# Altium PCB PWM Header Board.PcbDoc
Units mil, origin at the board's own origin, x right, y up, seen from the top; angles counter-clockwise.
Board outline 1402.76 x 2381.33 mil, 2 copper layers (Top Layer, Bottom Layer); 11 components, 21 nets, 87 pads, 5 vias.
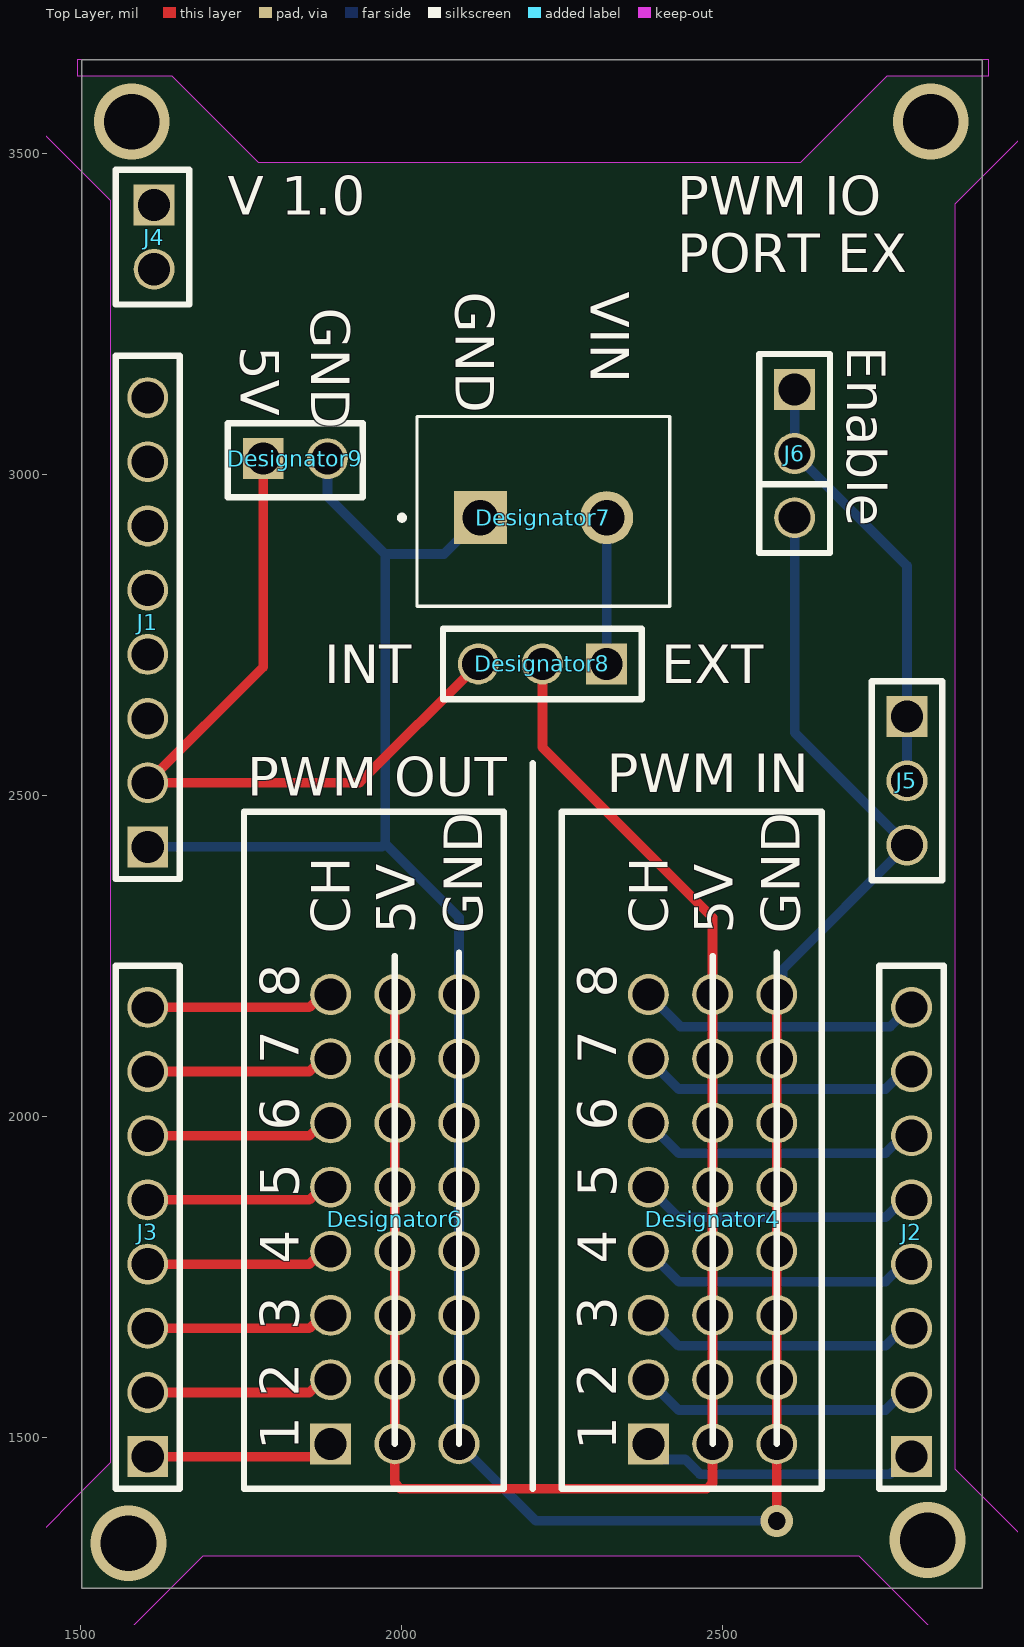
[diagram p0: Top Layer view]
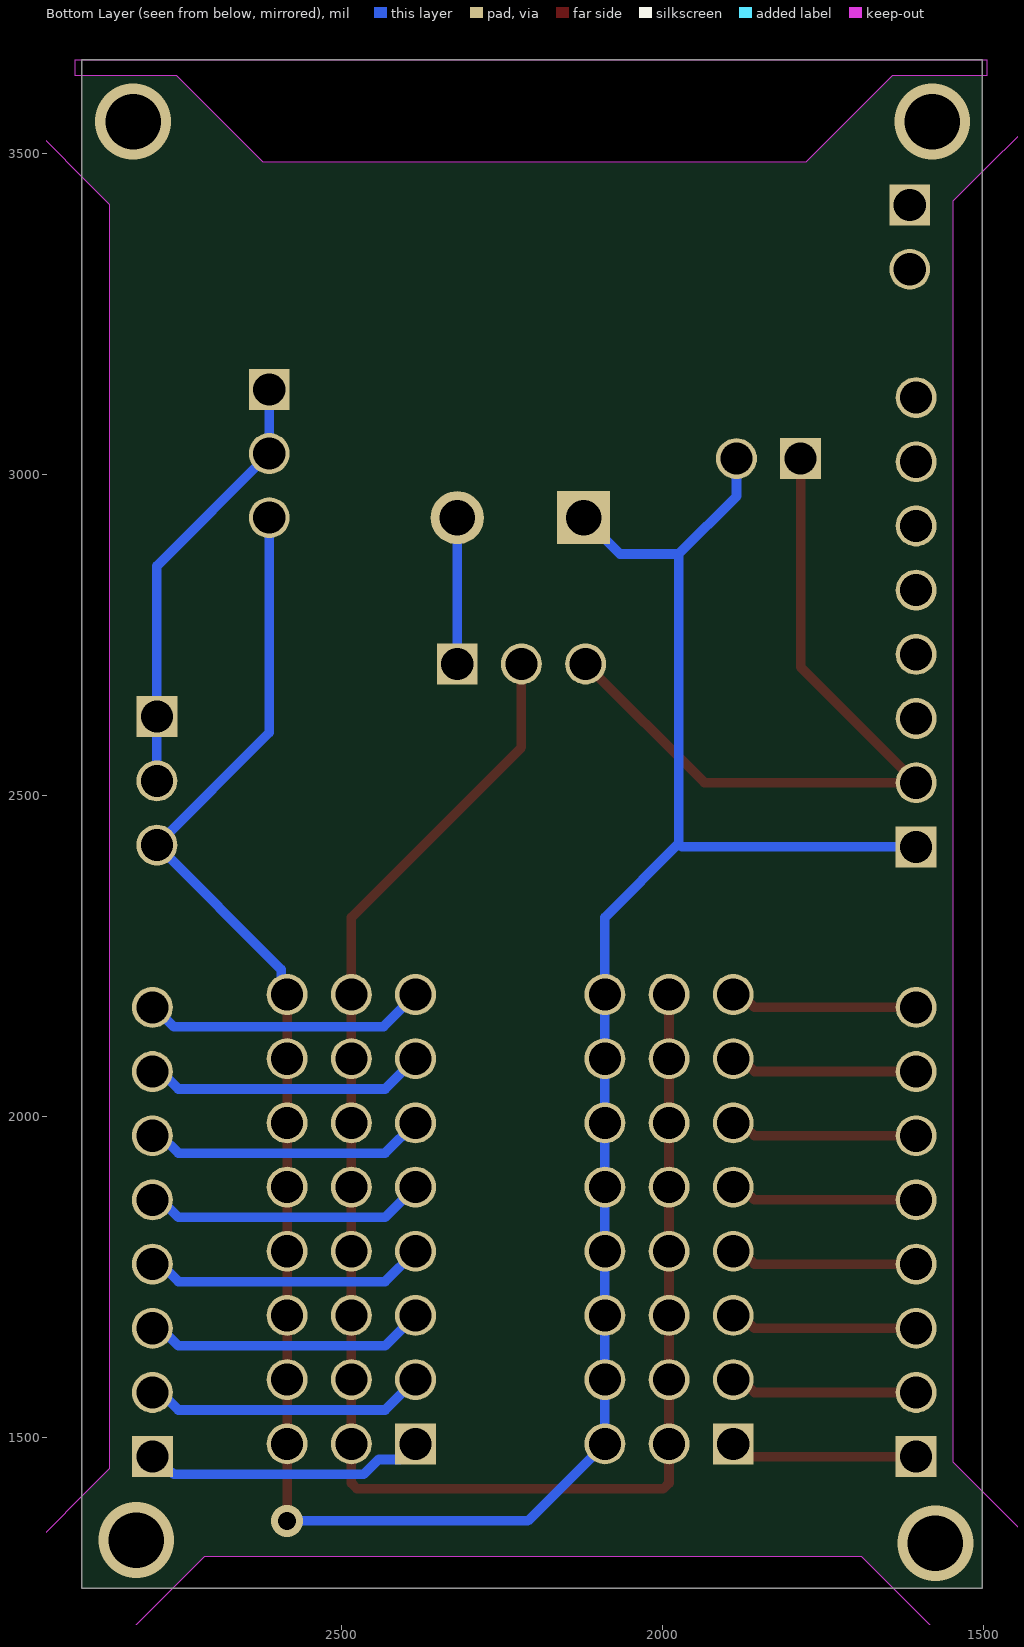
[diagram p1: Bottom Layer view, seen from below]

## Layer stack, top to bottom
Top Solder: solder mask 0.4, Solder Resist, Dk 3.5
Top Layer: signal copper 1.4
Dielectric 1: dielectric 12.6, FR-4, Dk 4.8
Bottom Layer: signal copper 1.4
Bottom Solder: solder mask 0.4, Solder Resist, Dk 3.5

## Board outline
1502.24,1265 1502.24,3646.33 2905,3646.33 2905,1265
cut-out: 1495,3621.33 1642.24,3621.33 1777.24,3486.33 2622.24,3486.33 2757.24,3621.33 2915,3621.33 2915,3646.33 1495,3646.33
cut-out: 1642.24,3621.33 1777.24,3486.33 2622.24,3486.33 2757.24,3621.33 2915,3621.33 2915,3646.33 1495,3646.33 1495,3621.33
cut-out: 3000,3559.09 2862.24,3421.33 2862.24,1451.33 3000,1313.57
cut-out: 2868.57,1160 2713.57,1315 1690.91,1315 1535.91,1160
cut-out: 1390,1304.09 1547.24,1461.33 1547.24,3426.33 1390,3583.57

## Design rules (kind name [scope] priority, off if disabled: settings)
Clearance Clearance_1 [OnMid vs OnMid] p1: gap=7.87 ignorepadtopadclearanceinfootprint=FALSE sourcerule=37 cellrowname=All cellrowtype=0 cellcolname=All cellcoltype=0 innerlayers=TRUE
Clearance Clearance_2 [(ExistsOnLayer('Top Layer') Or ExistsOnLayer('Bottom Layer')) vs (ExistsOnLayer('Top Layer') Or ExistsOnLayer('Bottom Layer'))] p2: gap=7.87 ignorepadtopadclearanceinfootprint=FALSE sourcerule=37 cellrowname=All cellrowtype=0 cellcolname=All cellcoltype=0 outerlayers=TRUE
Clearance [All] p3: gap=10 ignorepadtopadclearanceinfootprint=FALSE ismatrix=TRUE
PolygonConnect [All] p1: connectstyle=Relief reliefconductorwidth=10 reliefentries=4 polygonreliefangle="90 Angle" airgapwidth=10
RoutingVias [All] p1: holewidth=28 width=50 viastyle="Through Hole" minholewidth=28 minwidth=50 maxholewidth=28 maxwidth=50
SolderMaskExpansion [All] p1: expansion=4 istentingtop=FALSE
Width MaxMinWidth_1 [All] p1: maxlimit=20 minlimit=10 preferedwidth=20 minimp=50.000000 maximp=50.000000 favimp=50.000000
Width [All] p2: maxlimit=10 minlimit=10 preferedwidth=10
30 further rules are at their usual default settings.

## Components (designator, comment, footprint, x,y, rotation, side; value= is the part's Value field where it differs from the comment)
Designator4 "Comment" "PWM 8Ch Connector-Footprint-1" 2385,1490 r90 top
Designator6 "Comment" "PWM 8Ch Connector-Footprint-1" 1890,1490 r90 top
Designator7 "Comment" "Off Board Connector-Footprint-1" 2225.62,2934.11 r0 top
Designator8 "Comment" "3 Pin Header-Footprint-1" 2220,2705 r180 top
Designator9 "Comment" "2 Pin Header-Footprint-1" 1785,3025 r0 top
J1 "8 Pin Header" "8 Pin Header-Footprint-1" 1605,2920 r90 top
J2 "8 Pin Header" "8 Pin Header-Footprint-1" 2795,1970 r90 top
J3 "8 Pin Header" "8 Pin Header-Footprint-1" 1605,1970 r90 top
J4 "2 Pin Header" "2 Pin Header-Footprint-1" 1615,3420 r270 top
J5 "3 Pin Header" "3 Pin Header-Footprint-1" 2787.91,2522.87 r270 top
J6 "3 Pin Header" "3 Pin Header-Footprint-1" 2612.91,3032.87 r270 top (schematic designator J5)

## Footprints (in the part's own frame and the unit in brackets; to place one, negate y for a bottom-side part, rotate by r counter-clockwise, add the part's x,y. Pads: shape width x height; smd on the part's side, far side on the other; paste and mask are expansions set on the pad)
"2 Pin Header-Footprint-1" [mm]
  rect 1.62x1.62 hole 1.27: 1(0,0)
  round 1.62 hole 1.27: 2(2.54,0)
  silkscreen extent -1.4,-1.52 3.94,1.4
"3 Pin Header-Footprint-1" [mm]
  rect 1.62x1.62 hole 1.27: 1(-2.54,0)
  round 1.62 hole 1.27: 2(0,0) 3(2.54,0)
  silkscreen extent -3.94,-1.4 3.94,1.4
"8 Pin Header-Footprint-1" [mm]
  rect 1.62x1.62 hole 1.27: 1(-12.7,0)
  round 1.62 hole 1.27: 2(-10.16,0) 3(-7.62,0) 4(-5.08,0) 5(-2.54,0) 6(0,0) 7(2.54,0) 8(5.08,0)
  silkscreen extent -13.97,-1.27 6.73,1.27, body extent -12.34,-0.94 -0.34,1.06, height 6
"Off Board Connector-Footprint-1" [mm]
  rect 2.1x2.1 hole 1.4: 1(-2.603,-0.031)
  round 2.1 hole 1.4: 2(2.397,-0.031)
  silkscreen extent -5.8,-3.53 4.9,3.97, body extent -5.66,-3.34 4.94,4.16, height 10
"PWM 8Ch Connector-Footprint-1" [mm]
  rect 1.62x1.62 hole 1.27: 1(0,0)
  round 1.62 hole 1.27: 2(2.54,0) 3(5.08,0) 4(7.62,0) 5(10.16,0) 5V(0,-2.54) 5V(2.54,-2.54) 5V(5.08,-2.54) 5V(7.62,-2.54) 5V(10.16,-2.54) 5V(12.7,-2.54) 5V(15.24,-2.54) 5V(17.78,-2.54) 6(12.7,0) 7(15.24,0) 8(17.78,0) GND(0,-5.08) GND(2.54,-5.08) GND(5.08,-5.08) GND(7.62,-5.08) GND(10.16,-5.08) GND(12.7,-5.08) GND(15.24,-5.08) GND(17.78,-5.08)
  silkscreen extent -1.78,-6.86 25.02,3.43

## Part data
J1 J2 J3: library part CMP-00039-1, "8 Pin Breakout Header"
J4: library part CMP-00041-1, "2Pin  Breakout Header"
J5 J6: library part CMP-00043-1, "3 Pin Breakout Header"

## Via types
v1: diameter 118.11, hole 86.61, Top Layer to Bottom Layer, 4 vias
v2: diameter 50, hole 28, Top Layer to Bottom Layer, 1 vias

## Nets (pads, with @x,y where several pads share a name; then routed paths per layer and width w, separated by ;. In a path a pad name is that pad's centre, name@x,y a point inside that pad or via, vN(x,y) a via of type N, cw(c..) or ccw(c..) an arc to the next point about the centre after c; other vN are vias at no path point)
5v: Designator4.5V Designator6.5V Designator8.2 | length 2649.5
  Top Layer w15: Designator6.5V@1990,2190 1990,2090 1990,1990 1990,1890 1990,1790 1990,1690 1990,1590 1990,1490 1990,1428.79 1998.79,1420 2476.21,1420 2485,1428.79 2485,1490 2485,1590 2485,1690 2485,1790 2485,1890 2485,1990 2485,2090 2485,2190 2485,2310 2220,2575 Designator8.2
"5V_I N": Designator8.3 Designator9.1 J1.2 | length 1171.2
  Top Layer w15: Designator9.1 1785,2700 J1.2 1935,2520 Designator8.3
6V_IN: Designator7.2 Designator8.1 | length 228.8
  Bottom Layer w15: Designator8.1@2319.38,2705.62 Designator8.1 Designator7.2
CH_0_IN: Designator4.1 J2.1 | length 440.9
  Bottom Layer w15: Designator4.1 2409.39,1465.61 2442.55,1465.61 2465.42,1442.74 2761.82,1442.74 2764.7,1445.61 2770.61,1445.61 J2.1
CH_0_OUT: Designator6.1 J3.1 | length 314.5
  Top Layer w15: J3.1 1870,1470 Designator6.1
  Bottom Layer w15: Designator6.1@1875,1475 Designator6.1
CH_1_IN: Designator4.2 J2.2 | length 440.9
  Bottom Layer w15: Designator4.2 2432.26,1542.74 2754.54,1542.74 2781.8,1570 J2.2
CH_1_OUT: Designator6.2 J3.2 | length 303.9
  Top Layer w15: J3.2 1856.8,1570 1876.8,1590 Designator6.2
  Bottom Layer w15: Designator6.2@1882.5,1582.5 Designator6.2
CH_2_IN: Designator4.3 J2.3 | length 440.9
  Bottom Layer w15: Designator4.3 2432.26,1642.74 2754.54,1642.74 2781.8,1670 J2.3
CH_2_OUT: Designator6.3 J3.3 | length 303.9
  Top Layer w15: J3.3 1856.8,1670 1876.8,1690 Designator6.3
  Bottom Layer w15: Designator6.3@1882.5,1682.5 Designator6.3
CH_3_IN: Designator4.4 J2.4 | length 440.9
  Bottom Layer w15: Designator4.4 2432.26,1742.74 2754.54,1742.74 2781.8,1770 J2.4
CH_3_OUT: Designator6.4 J3.4 | length 303.9
  Top Layer w15: J3.4 1856.8,1770 1876.8,1790 Designator6.4
  Bottom Layer w15: Designator6.4@1882.5,1782.5 Designator6.4
CH_4_IN: Designator4.5 J2.5 | length 440.9
  Bottom Layer w15: Designator4.5 2432.26,1842.74 2754.54,1842.74 2781.8,1870 J2.5
CH_4_OUT: Designator6.5 J3.5 | length 303.9
  Top Layer w15: J3.5 1856.8,1870 1876.8,1890 Designator6.5
  Bottom Layer w15: Designator6.5@1882.5,1882.5 Designator6.5
CH_5_IN: Designator4.6 J2.6 | length 440.9
  Bottom Layer w15: Designator4.6 2432.26,1942.74 2754.54,1942.74 2781.8,1970 J2.6
CH_5_OUT: Designator6.6 J3.6 | length 303.9
  Top Layer w15: J3.6 1856.8,1970 1876.8,1990 Designator6.6
  Bottom Layer w15: Designator6.6@1882.5,1982.5 Designator6.6
CH_6_IN: Designator4.7 J2.7 | length 440.9
  Bottom Layer w15: Designator4.7 2432.26,2042.74 2754.54,2042.74 2781.8,2070 J2.7
CH_6_OUT: Designator6.7 J3.7 | length 303.9
  Top Layer w15: J3.7 1856.8,2070 1876.8,2090 Designator6.7
  Bottom Layer w15: Designator6.7@1882.5,2082.5 Designator6.7
CH_7_IN: Designator4.8 J2.8 | length 443.1
  Bottom Layer w15: Designator4.8 2435,2140 2761.82,2140 2791.82,2170 J2.8
CH_7_OUT: Designator6.8 J3.8 | length 303.9
  Top Layer w15: J3.8 1856.8,2170 1876.8,2190 Designator6.8
  Bottom Layer w15: Designator6.8@1882.5,2182.5 Designator6.8
Enable: J5.1 J5.2 J6.1 J6.2 | length 682.5
  Bottom Layer w15: J6.1 J6.2 2787.91,2857.87 J5.1 J5.2
GND: Designator4.GND Designator6.GND Designator7.1 Designator9.2 J1.1 J5.3 J6.3 | length 4429.5
  Top Layer w15: v2(2585,1370) 2585,1490 2585,1590 2585,1690 2585,1790 2585,1890 2585,1990 2585,2090 Designator4.GND@2585,2190
  Bottom Layer w15: J1.1 1970,2420 1975,2425 ; Designator9.2 1885,2966.24 1975,2876.24 ; Designator7.1@2121.91,2934.11 Designator7.1 2066.52,2876.24 1975,2876.24 ; v2(2585,1370) 2210,1370 2090,1490 2090,1590 2090,1690 2090,1790 2090,1890 2090,1990 2090,2090 2090,2190 2090,2310 1975,2425 ; Designator4.GND@2585,2190 2594.33,2199.33 2594.33,2229.29 J5.3 2612.91,2597.87 J6.3 ; 1975,2425 1975,2876.24
pads on no net: J1.3 J1.4 J1.5 J1.6 J1.7 J1.8 J4.1 J4.2
copper on no net:
  other v1: 1575,1335 2820,1340 1580,3550 2825,3550

## Silkscreen, mask and mechanical layers (free items; w line width, h text height)
Top Overlay:
  lines w10: 2205,1420 2205,2550 ; 2560,2985 2665,2985
  text "V 1.0" at 1730,3405 h60
  text "PWM IO" at 2430,3405 h60
  text "PORT EX" at 2430,3315 h60
  text "GND" at 2085,3285 h60 r270
  text "VIN" at 2295,3285 h60 r270
  text "GND" at 1860,3260 h60 r270
  text "5V" at 1750,3200 h60 r270
  text "Enable" at 2695,3200 h60 r270
  text "INT" at 1880,2675 h60
  text "EXT" at 2405,2675 h60
  text "PWM IN" at 2320,2505 h60
  text "PWM OUT" at 1760,2500 h60

## Text inside footprints (layer, text, board x,y; h text height)
Designator4: Top Overlay "GND" at 2621.15,2284.48 h60 r90; Top Overlay "5V" at 2516.15,2284.48 h60 r90; Top Overlay "CH" at 2415,2285 h60 r90; Top Overlay "7" at 2335,2081.43 h60 r90; Top Overlay "6" at 2335,1977.86 h60 r90; Top Overlay "5" at 2335,1874.29 h60 r90; Top Overlay "4" at 2335,1770.72 h60 r90; Top Overlay "3" at 2335,1667.15 h60 r90; Top Overlay "2" at 2335,1563.58 h60 r90; Top Overlay "1" at 2335,1480 h60 r90; Top Overlay "8" at 2335,2185 h60 r90
Designator6: Top Overlay "GND" at 2126.15,2284.48 h60 r90; Top Overlay "5V" at 2021.15,2284.48 h60 r90; Top Overlay "CH" at 1920,2285 h60 r90; Top Overlay "7" at 1840,2081.43 h60 r90; Top Overlay "6" at 1840,1977.86 h60 r90; Top Overlay "5" at 1840,1874.29 h60 r90; Top Overlay "4" at 1840,1770.72 h60 r90; Top Overlay "3" at 1840,1667.15 h60 r90; Top Overlay "2" at 1840,1563.58 h60 r90; Top Overlay "1" at 1840,1480 h60 r90; Top Overlay "8" at 1840,2185 h60 r90